# Altium PCB POWER_TESTER_V2.PcbDoc (part 1 of 2)
Units mm, origin at the board's own origin, x right, y up, seen from the top; angles counter-clockwise.
Board outline 100 x 151 mm, 2 copper layers (Top Layer, Bottom Layer); 154 components, 159 nets, 653 pads, 187 vias.
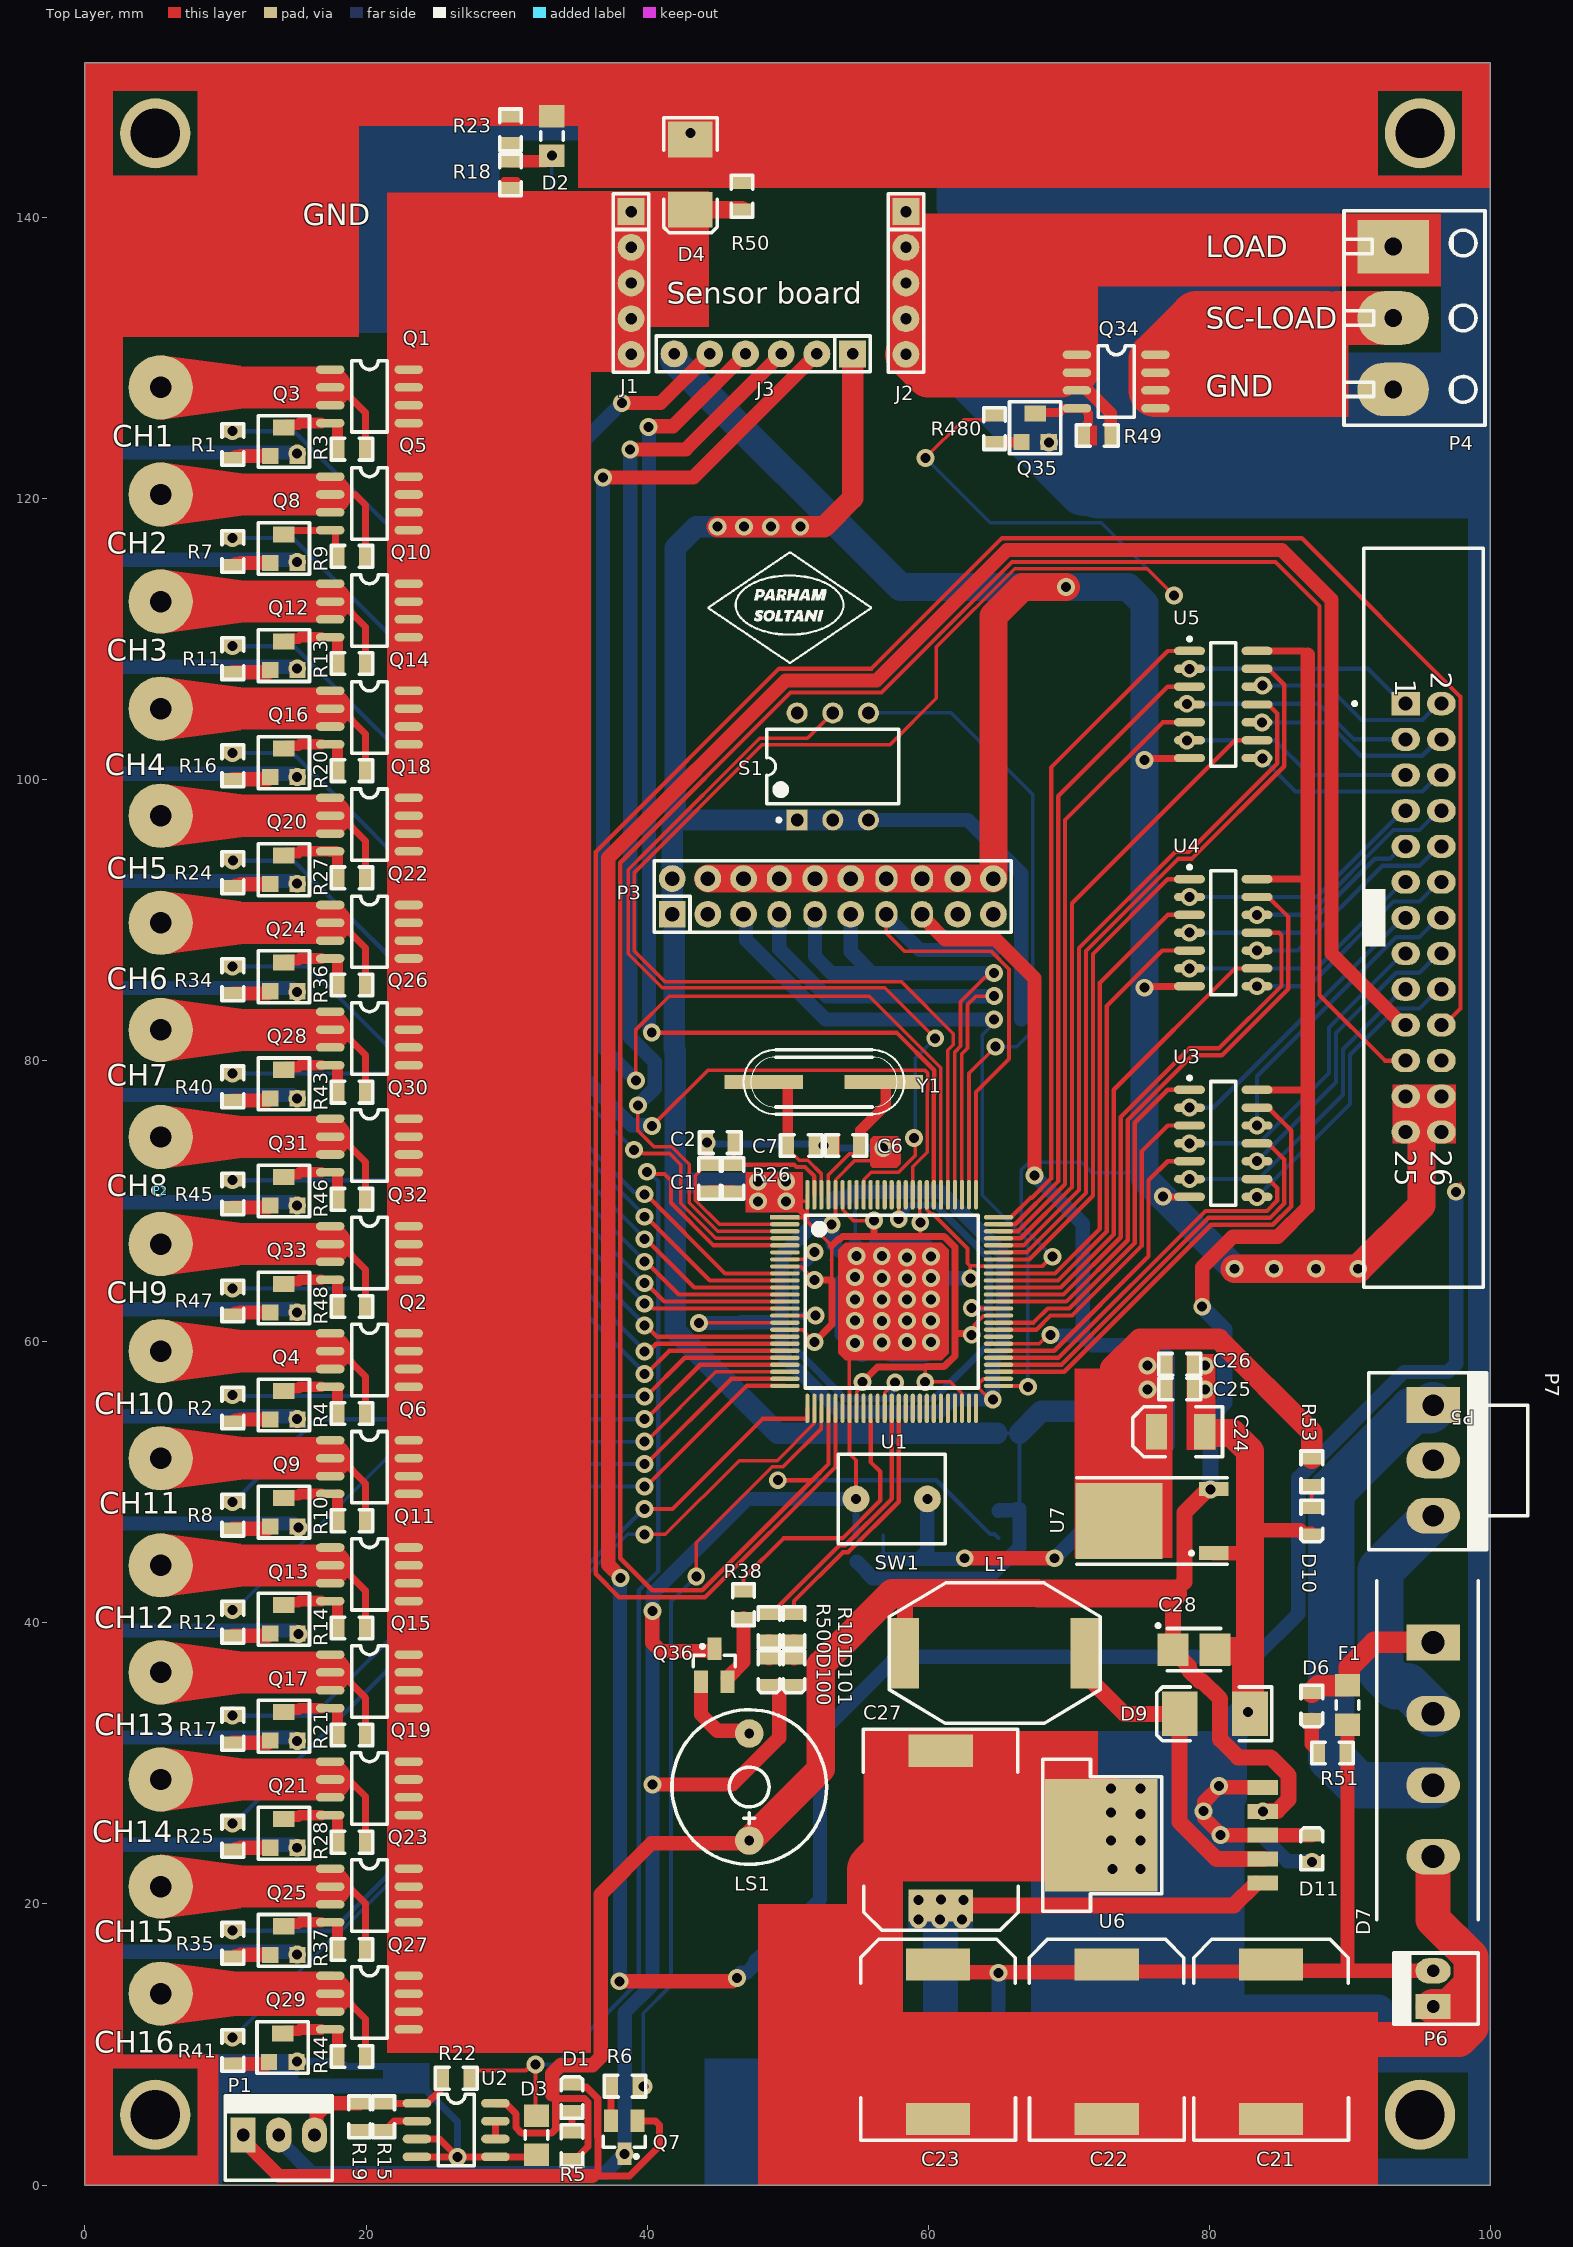
[diagram p0: Top Layer view]
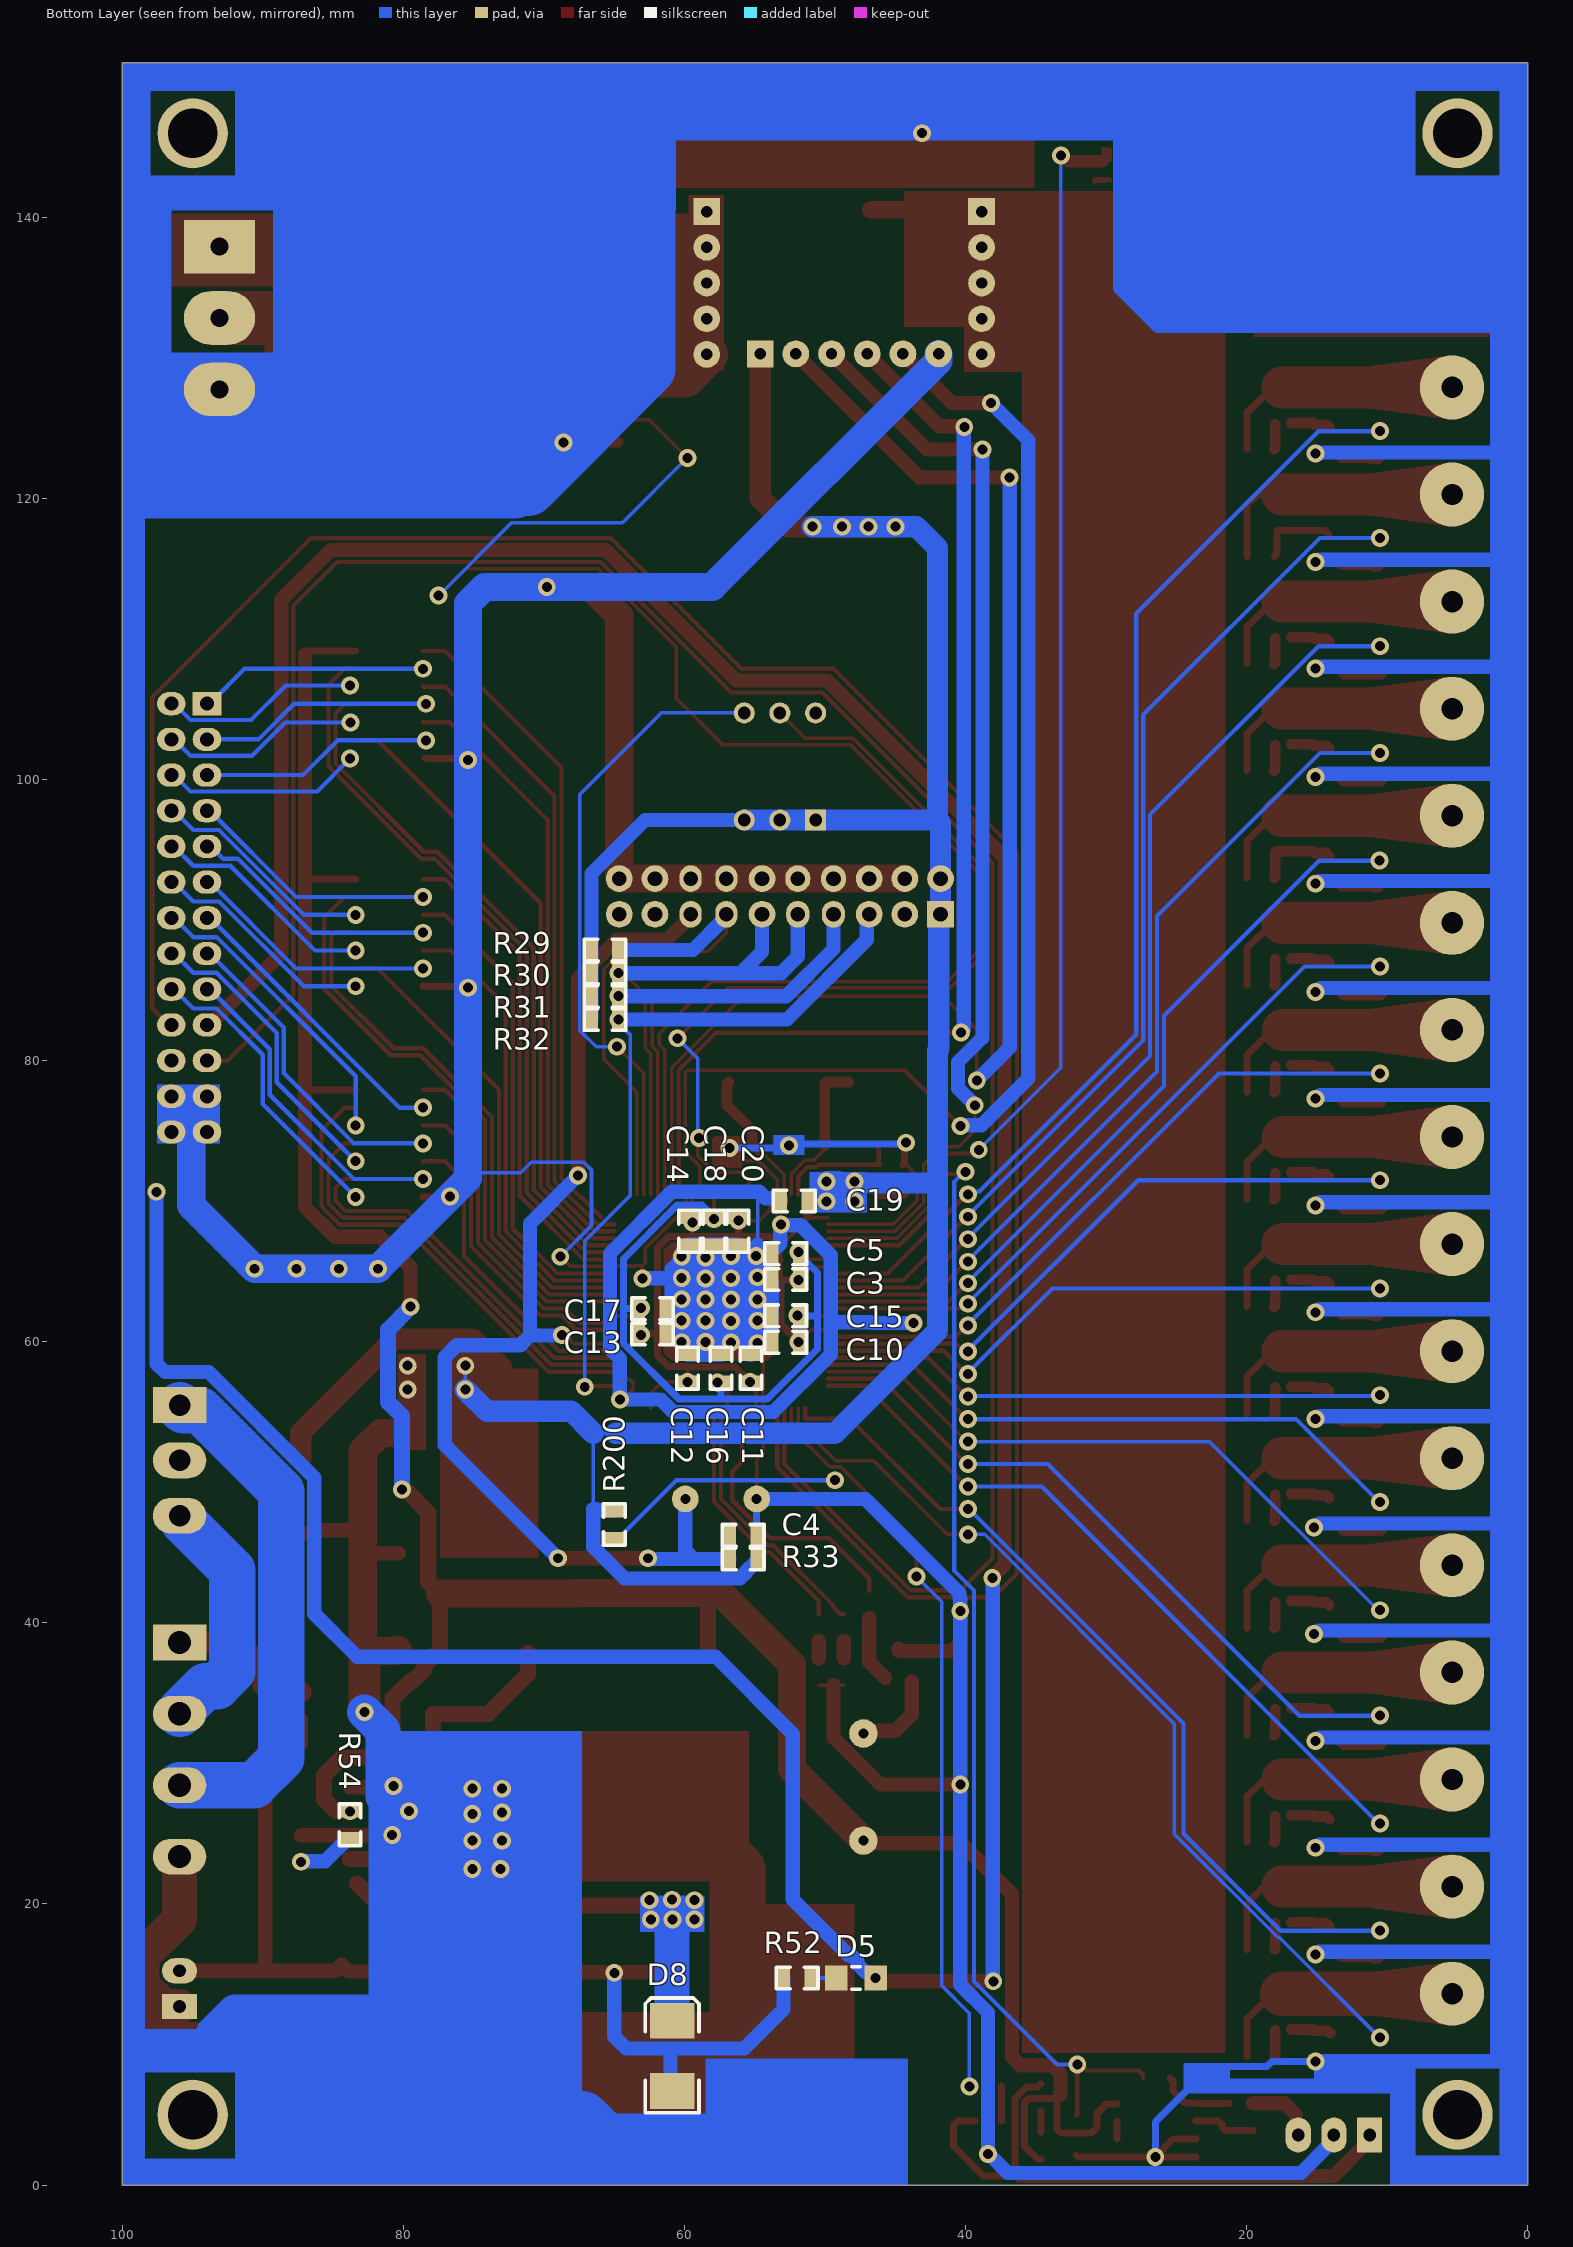
[diagram p1: Bottom Layer view, seen from below]

## Layer stack, top to bottom
Top Solder: solder mask 0.0102, Solder Resist, Dk 3.5
Top Layer: signal copper 0.0356
Dielectric1: dielectric 0.32, FR-4, Dk 4.8
Bottom Layer: signal copper 0.0356
Bottom Solder: solder mask 0.0102, Solder Resist, Dk 3.5

## Board outline
0,0 0,151 100,151 100,0

## Design rules (kind name [scope] priority, off if disabled: settings)
Clearance Clearance_1 [(InNet('GND') OR InNet('SGND')) vs (InNet('GND') OR InNet('SGND'))] p1: gap=0 ignorepadtopadclearanceinfootprint=FALSE
Clearance [All] p2: gap=0.191 ignorepadtopadclearanceinfootprint=FALSE except(0: Arc-Hole Track-Hole SMDPad-Hole THPad-Hole Via-Hole Fill-Hole Poly-Hole Region-Hole Text-Hole)
ComponentClearance [All] p1 off: gap=0.254 collisioncheckmode=3 verticalgap=0.254 showdistances=FALSE
Height [All] p1 off: minheight=0 maxheight=25.4 prefheight=12.7
HoleSize [All] p1 off: absolutevalues=TRUE maxlimit=2.54 minlimit=0.025 maxpercent=80.000 minpercent=20.000
HoleToHoleClearance [All] p1 off: gap=0.254 allowstackedmicrovias=TRUE
LayerPairs [All] p1 off: enforce=TRUE
MinimumSolderMaskSliver [All] p1 off: minsoldermaskwidth=0.254
NetAntennae [All] p1 off: netantennaetolerance=0
PolygonConnect [All] p1: connectstyle=Direct reliefconductorwidth=0.254 reliefentries=4 polygonreliefangle="90 Angle" airgapwidth=0.254
RoutingVias [All] p1: holewidth=0.711 width=1.27 viastyle="Through Hole" minholewidth=0.279 minwidth=0.762 maxholewidth=1.27 maxwidth=2.54
ShortCircuit [(InNet('GND') OR InNet('SGND')) vs (InNet('GND') OR InNet('SGND'))] p1: allowed=TRUE
SilkToSilkClearance [All] p1 off: silktosilkclearance=0.254
SilkToSolderMaskClearance [IsPad] p1 off: minsilkscreentomaskgap=0.254 clearancetoexposedcopper=TRUE
SolderMaskExpansion [All] p1: expansion=0.102 istentingtop=FALSE
Width [All] p1: maxlimit=5.08 minlimit=0.254 preferedwidth=1.016
20 further rules are at their usual default settings.

## Classes and differential pairs
component class PAGE1: C3 C4 C5 C10 C11 C12 C13 C14 C15 C16 C17 C18 C19 C20 C28 D5 D8 R29 R30 R31 R32 R33 R52 R54 R200

## Components (designator, comment, footprint, x,y, rotation, side; value= is the part's Value field where it differs from the comment)
C1 "10nF" 0603BIG 44.45,71.628 r90 top
C2 "1nF" 0603BIG 45.212,74.168 r180 top
C3 "10uF" 0603BIG 52.807,64.44 r180 bottom
C4 "10uF" 0603BIG 55.829,46.228 r0 bottom
C5 "10uF" 0603BIG 52.806,66.269 r180 bottom
C6 "10pF" 0603BIG 54.153,73.965 r180 top
C7 "10pF" 0603BIG 50.978,73.965 r0 top
C10 "100nF" 0603BIG 52.806,59.969 r0 bottom
C11 "100nF" 0603BIG 55.27,58.115 r90 bottom
C12 "100nF" 0603BIG 59.792,58.115 r90 bottom
C13 "100nF" 0603BIG 62.281,60.554 r180 bottom
C14 "100nF" 0603BIG 59.639,67.869 r270 bottom
C15 "100nF" 0603BIG 52.806,61.849 r0 bottom
C16 "100nF" 0603BIG 57.404,58.115 r90 bottom
C17 "100nF" 0603BIG 62.281,62.357 r180 bottom
C18 "100nF" 0603BIG 57.912,67.869 r270 bottom
C19 "100nF" 0603BIG 52.197,70.028 r0 bottom
C20 "100nF" 0603BIG 56.21,67.869 r270 bottom
C21 "470uf" CAP-SMD-HV2 84.4,15.7 r270 top
C22 "470uf" CAP-SMD-HV2 72.7,15.7 r270 top
C23 "470uf" CAP-SMD-HV2 60.7,15.7 r270 top
C24 "220uf" 1210-C 76.247,53.594 r270 top
C25 "100n" 0603big 77.898,56.642 r180 top
C26 "10n" 0603big 77.898,58.395 r180 top
C27 "220U-50V" CAP-SMD-HV2 60.9,19.9 r90 top
C28 "100u 10V" CAP_TANTAL_B 78.914,38.1 r0 top
D1 "LED" 0805-d1 34.652,5.258 r90 top
D2 "D Zener" 8-1206 33.223,145.81 r270 top
D3 "D Zener" 8-1206 32.131,3.546 r90 top
D4 "DIODE" ss14 43.078,145.553 r270 top
D5 "D Zener" 8-1206 47.796,14.732 r0 bottom
D6 "LED" 0805-2D 87.296,35.052 r270 top
D7 "BRIDGE" BRG5A 95.932,23.368 r0 top
D8 "50SQ080" SS14 60.88,6.684 r90 bottom
D9 "SS16" SS14 82.898,33.528 r180 top
D10 "LED" 0805-D1 87.296,48.209 r270 top
D11 "LED" 0805-d1 87.296,22.962 r90 top
D100 "LED" 0805-d1 48.666,37.49 r270 top
D101 "LED" 0805-d1 50.444,37.49 r270 top
F1 "FUSE" 8-1206 89.836,34.16 r270 top
J1 "CON5" SIP5 38.862,135.342 r90 top
J2 "CON5" SIP5 58.42,135.342 r90 top
J3 "CON6" SIP6 48.27,130.3 r0 top
L1 "22UH 5A" "self smd" 71.14,37.846 r0 top
LS1 "Buzzer" Buzzer 47.269,28.321 r180 top
P1 "Header 3" mokhaberati3PIN 9.982,0.35 r0 top
P2 "Header 16" wire_connector 5.385,63.144 r270 top
P3 "Header 10X2" IDC20 41.783,90.424 r0 top
P4 "Header 3" "PHONIX 3" 93.091,132.853 r270 top
P5 "Header 13X2" 918526x904 95.25,90.17 r270 top
P6 "Header 2" mokhaberati 93.138,16.51 r90 top
P7 "Header 3" SIP3-155-la 95.932,51.562 r270 top
Q1 "IRF9310" so-8 20.244,127.279 r0 top
Q2 "IRF9310" so-8 20.244,58.699 r0 top
Q3 "2N7002" SOT-23 14.148,124.054 r0 top
Q4 "2N7002" SOT-23 14.148,55.489 r0 top
Q5 "IRF9310" so-8 20.244,119.659 r0 top
Q6 "IRF9310" so-8 20.244,51.079 r0 top
Q7 "2N2222" SOT23_M 38.379,3.385 r270 top
Q8 "2N7002" SOT-23 14.148,116.435 r0 top
Q9 "2N7002" SOT-23 14.148,47.871 r0 top
Q10 "IRF9310" so-8 20.244,112.039 r0 top
Q11 "IRF9310" so-8 20.244,43.459 r0 top
Q12 "2N7002" SOT-23 14.148,108.817 r0 top
Q13 "2N7002" SOT-23 14.148,40.252 r0 top
Q14 "IRF9310" so-8 20.244,104.419 r0 top
Q15 "IRF9310" so-8 20.244,35.839 r0 top
Q16 "2N7002" SOT-23 14.148,101.199 r0 top
Q17 "2N7002" SOT-23 14.148,32.634 r0 top
Q18 "IRF9310" so-8 20.244,96.799 r0 top
Q19 "IRF9310" so-8 20.244,28.219 r0 top
Q20 "2N7002" SOT-23 14.148,93.58 r0 top
Q21 "2N7002" SOT-23 14.148,25.016 r0 top
Q22 "IRF9310" so-8 20.244,89.179 r0 top
Q23 "IRF9310" so-8 20.244,20.599 r0 top
Q24 "2N7002" SOT-23 14.148,85.962 r0 top
Q25 "2N7002" SOT-23 14.148,17.397 r0 top
Q26 "IRF9310" so-8 20.244,81.585 r0 top
Q27 "IRF9310" so-8 20.244,12.979 r0 top
Q28 "2N7002" SOT-23 14.148,78.344 r0 top
Q29 "2N7002" SOT-23 14.072,9.779 r0 top
Q30 "IRF9310" so-8 20.244,73.965 r0 top
Q31 "2N7002" SOT-23 14.148,70.725 r0 top
Q32 "IRF9310" so-8 20.244,66.319 r0 top
Q33 "2N7002" SOT-23 14.148,63.107 r0 top
Q34 "IRF9310" so-8 73.381,128.332 r0 top
Q35 "2N7002" SOT-23 67.615,125.03 r0 top
Q36 "2N2222" SOT23_M 44.78,36.982 r90 top
R1 "330" 0603BIG 10.516,123.85 r90 top
R2 "330" 0603BIG 10.516,55.285 r90 top
R3 "10k" 0603BIG 18.999,123.52 r0 top
R4 "10k" 0603BIG 18.999,54.894 r0 top
R5 "1K" 0603BIG 34.646,2.806 r90 top
R6 "500" 0603BIG 38.43,7.036 r0 top
R7 "330" 0603BIG 10.516,116.232 r90 top
R8 "330" 0603BIG 10.516,47.667 r90 top
R9 "10k" 0603BIG 18.999,115.895 r0 top
R10 "10k" 0603BIG 18.999,47.269 r0 top
R11 "330" 0603BIG 10.516,108.614 r90 top
R12 "330" 0603BIG 10.516,40.049 r90 top
R13 "10k" 0603BIG 18.999,108.27 r0 top
R14 "10k" 0603BIG 18.999,39.644 r0 top
R15 "820" 0603BIG 21.26,4.852 r270 top
R16 "330" 0603BIG 10.516,100.995 r90 top
R17 "330" 0603BIG 10.516,32.431 r90 top
R18 "1K" 0603BIG 30.277,143.038 r90 top
R19 "1K" 0603BIG 19.533,4.852 r90 top
R20 "10k" 0603BIG 18.999,100.645 r0 top
R21 "10k" 0603BIG 18.999,32.019 r0 top
R22 "1k" 0603big 26.416,7.595 r180 top
R23 "1K" 0603BIG 30.277,146.239 r90 top
R24 "330" 0603BIG 10.516,93.377 r90 top
R25 "330" 0603BIG 10.516,24.812 r90 top
R26 "1.5K" 0603BIG 46.101,71.628 r270 top
R27 "10k" 0603BIG 18.999,93.02 r0 top
R28 "10k" 0603BIG 18.999,24.394 r0 top
R29 "100K" 0603BIG 65.659,87.884 r180 bottom
R30 "100K" 0603BIG 65.659,86.233 r180 bottom
R31 "100K" 0603BIG 65.659,84.582 r180 bottom
R32 "100K" 0603BIG 65.659,82.931 r180 bottom
R33 "1K" 0603BIG 55.829,44.552 r0 bottom
R34 "330" 0603BIG 10.516,85.759 r90 top
R35 "330" 0603BIG 10.516,17.194 r90 top
R36 "10k" 0603BIG 18.999,85.395 r0 top
R37 "10k" 0603BIG 18.999,16.769 r0 top
R38 "1K" 0603BIG 46.863,41.3 r90 top
R40 "330" 0603BIG 10.516,78.14 r90 top
R41 "330" 0603BIG 10.516,9.576 r90 top
R43 "10k" 0603BIG 18.999,77.77 r0 top
R44 "10k" 0603BIG 18.999,9.144 r0 top
R45 "330" 0603BIG 10.516,70.522 r90 top
R46 "10k" 0603BIG 18.999,70.145 r0 top
R47 "330" 0603BIG 10.516,62.904 r90 top
R48 "10k" 0603BIG 18.999,62.52 r0 top
R49 "10k" 0603BIG 72.034,124.497 r0 top
R50 "10k" 0603BIG 46.746,141.518 r270 top
R51 "1k" 0603BIG 88.769,30.734 r180 top
R52 "330" 0603BIG 51.99,14.732 r180 bottom
R53 "R" 0603big 87.296,50.749 r90 top
R54 "R" 0603big 83.81,25.627 r90 bottom
R101 "1K" 0603BIG 50.45,39.675 r270 top
R200 "1K" 0603BIG 65,47 r90 bottom
R480 "330" 0603BIG 64.719,124.979 r90 top
R500 "1K" 0603BIG 48.672,39.675 r270 top
S1 "SW DIP-3" DIP-6 53.213,100.94 r90 top
SW1 "P.B" SW_200 54.864,48.819 r90 top
U1 "AT91SAM7X256-AU" LQFP100 57.404,62.865 r0 top
U2 "LM258" so-8 26.416,3.912 r0 top
U3 "SN7404N" D014_N 81,74.122 r0 top
U4 "SN7404N" D014_N 81,89.112 r0 top
U5 "SN7404N" D014_N 81,105.352 r0 top
U6 "LM2576-5v" LM2576-SMD 83.81,21.492 r90 top
U7 "LD1086DT33" 7805_SMD 76.955,47.244 r90 top
Y1 "18.432 MHZ" NIRAXTAL-smd 52.578,78.486 r180 top

## Footprints (in the part's own frame and the unit in brackets; to place one, negate y for a bottom-side part, rotate by r counter-clockwise, add the part's x,y. Pads: shape width x height; smd on the part's side, far side on the other; paste and mask are expansions set on the pad)
8-1206 [mm] "Chip Resistor; Body 3.1 x 1.6 mm (LxW typ)"
  rect 1.6x1.8 smd: 1(-1.4,0) 2(1.4,0)
  silkscreen extent -0.3,-0.8 0.3,0.8
0603BIG [mm]
  rect 0.9x1.4 smd: 1(0.965,0) 2(-0.965,0)
  silkscreen extent -1.48,-0.77 1.49,0.77
0603big [mm]
  rect 0.9x1.4 smd: 1(0.965,0) 2(-0.965,0)
  silkscreen extent -1.48,-0.77 1.49,0.77
0805-2D [mm]
  rect 0.9x1.4 smd: A(0,0) K(1.93,0)
  silkscreen extent -0.52,-0.77 2.45,0.77
0805-d1 [mm]
  rect 0.9x1.4 smd: A(0,0) K(1.93,0)
  silkscreen extent -0.52,-0.77 2.45,0.77
0805-D1 [mm]
  rect 0.9x1.4 smd: A(0,0) K(1.93,0)
  silkscreen extent -0.52,-0.77 2.45,0.77
1210-C [mil]
  rect 100x60 smd: 1(0,0) 2(0,135)
  silkscreen extent -70,-66 70,185
7805_SMD [mm]
  rect 1x2.1 smd: 1(2.285,-3.375) 2(-2.285,-3.375)
  rect 5.4x6.2 smd: 3(0,3.375)
  silkscreen extent -3.08,-4.33 3.08,6.37
918526x904 [mm] "Connector; IDC, Thru-Hole; 26 Position; Vertical; Pitch 2.54 mm; Body 52.60 x 8.5 x 25.75 mm (LxWxH), Locking levers"
  rect 1.65x2.032 hole 1: 1(-15.24,-1.27)
  oval 1.65x2.032 hole 1: 2(-15.24,1.27) 3(-12.7,-1.27) 4(-12.7,1.27) 5(-10.16,-1.27) 6(-10.16,1.27) 7(-7.62,-1.27) 8(-7.62,1.27) 9(-5.08,-1.27) 10(-5.08,1.27) 11(-2.54,-1.27) 12(-2.54,1.27) 13(0,-1.27) 14(0,1.27) 15(2.54,-1.27) 16(2.54,1.27) 17(5.08,-1.27) 18(5.08,1.27) 19(7.62,-1.27) 20(7.62,1.27) 21(10.16,-1.27) 22(10.16,1.27) 23(12.7,-1.27) 24(12.7,1.27) 25(15.24,-1.27) 26(15.24,1.27)
  silkscreen extent -26.3,-5.02 26.3,4.25
BRG5A [mil]
  oval 150x100 hole 65: AC1(0,200) AC2(0,400) DC-(0,0)
  rect 150x100 hole 65: DC+(0,600)
  silkscreen extent -157,-177 126,773
Buzzer [mil]
  round 80 hole 27.56: 1A(0,150) 2A(0,-150)
  silkscreen extent -217,-216 216,216
CAP-SMD-HV2 [mil]
  rect 90x180 smd: 1(0,0) 2(433.07,0)
  silkscreen extent -70,-217 493,217
CAP_TANTAL_B [mm] "Molded Capacitor, 2-Leads, Body 3.50x2.80mm, IPC Medium Density"
  rect 2.2x2.3 smd: 1(-1.5,0) 2(1.5,0)
  silkscreen extent -2.67,-1.5 1.9,1.82, body extent -1.85,-1.5 1.85,1.5, height 1.9
D014_N [mm] "SOIC, 14-Leads, Body 8.7x3.9mm, Pitch 1.27mm, IPC Medium Density"
  oval 2.2x0.6 smd: 1(-2.4,3.81) 2(-2.4,2.54) 3(-2.4,1.27) 4(-2.4,0) 5(-2.4,-1.27) 6(-2.4,-2.54) 7(-2.4,-3.81) 8(2.4,-3.81) 9(2.4,-2.54) 10(2.4,-1.27) 11(2.4,0) 12(2.4,1.27) 13(2.4,2.54) 14(2.4,3.81)
  silkscreen extent -2.52,-4.4 0.9,4.78, body extent -1.95,-4.33 1.95,4.33, height 1.75
DIP-6 [mm] "DIP; 6 Leads; Row Spacing 7.62 mm; Pitch 2.54 mm"
  rect 1.5x1.5 hole 0.9: 1(-3.81,2.54)
  round 1.5 hole 0.9: 2(-3.81,0) 3(-3.81,-2.54) 4(3.81,-2.54) 5(3.81,0) 6(3.81,2.54)
  silkscreen extent -3.93,-4.7 2.65,4.7, body extent -3.55,-4.7 3.55,4.7, height 5.46
IDC20 [mil]
  rect 75x75 hole 41: 1(0,0)
  round 75 hole 41: 2(0,100) 3(100,0) 4(100,100) 5(200,0) 6(200,100) 11(500,0) 12(500,100) 17(800,0) 18(800,100) 19(900,0) 20(900,100)
  oval 65x75 hole 41: 7(300,0) 9(400,0)
  oval 70x75 hole 41: 8(300,100) 10(400,100)
  oval 62x75 hole 41: 13(600,0) 14(600,100) 15(700,0) 16(700,100)
  silkscreen extent -50,-50 950,150
LM2576-SMD [mm]
  rect 1.07x2.16 smd: FB(5.1,0) GND(3.4,0) O\N\/OFF(6.8,0) OUT(1.7,0) VIN(0,0)
  rect 8x8 smd: GND(3.4,11.5)
  silkscreen extent -2,7.18 8.8,15.67
LQFP100 [mm]
  rect 2.1x0.3 smd: 1(-7.6,6)
  oval 2.1x0.3 smd: 2(-7.6,5.5) 3(-7.6,5) 4(-7.6,4.5) 5(-7.6,4) 6(-7.6,3.5) 7(-7.6,3) 8(-7.6,2.5) 9(-7.6,2) 10(-7.6,1.5) 11(-7.6,1) 12(-7.6,0.5) 13(-7.6,0) 14(-7.6,-0.5) 15(-7.6,-1) 16(-7.6,-1.5) 17(-7.6,-2) 18(-7.6,-2.5) 19(-7.6,-3) 20(-7.6,-3.5) 21(-7.6,-4) 22(-7.6,-4.5) 23(-7.6,-5) 24(-7.6,-5.5) 25(-7.6,-6) 51(7.6,-6) 52(7.6,-5.5) 53(7.6,-5) 54(7.6,-4.5) 55(7.6,-4) 56(7.6,-3.5) 57(7.6,-3) 58(7.6,-2.5) 59(7.6,-2) 60(7.6,-1.5) 61(7.6,-1) 62(7.6,-0.5) 63(7.6,0) 64(7.6,0.5) 65(7.6,1) 66(7.6,1.5) 67(7.6,2) 68(7.6,2.5) 69(7.6,3) 70(7.6,3.5) 71(7.6,4) 72(7.6,4.5) 73(7.6,5) 74(7.6,5.5) 75(7.6,6)
  oval 0.3x2.1 smd: 26(-6,-7.6) 27(-5.5,-7.6) 28(-5,-7.6) 29(-4.5,-7.6) 30(-4,-7.6) 31(-3.5,-7.6) 32(-3,-7.6) 33(-2.5,-7.6) 34(-2,-7.6) 35(-1.5,-7.6) 36(-1,-7.6) 37(-0.5,-7.6) 38(0,-7.6) 39(0.5,-7.6) 40(1,-7.6) 41(1.5,-7.6) 42(2,-7.6) 43(2.5,-7.6) 44(3,-7.6) 45(3.5,-7.6) 46(4,-7.6) 47(4.5,-7.6) 48(5,-7.6) 49(5.5,-7.6) 50(6,-7.6) 76(6,7.6) 77(5.5,7.6) 78(5,7.6) 79(4.5,7.6) 80(4,7.6) 81(3.5,7.6) 82(3,7.6) 83(2.5,7.6) 84(2,7.6) 85(1.5,7.6) 86(1,7.6) 87(0.5,7.6) 88(0,7.6) 89(-0.5,7.6) 90(-1,7.6) 91(-1.5,7.6) 92(-2,7.6) 93(-2.5,7.6) 94(-3,7.6) 95(-3.5,7.6) 96(-4,7.6) 97(-4.5,7.6) 98(-5,7.6) 99(-5.5,7.6) 100(-6,7.6)
  silkscreen extent -6.15,-6.15 6.15,6.15
mokhaberati [mm] "Connector; Header; 2 Position"
  rect 1.8x2.5 hole 0.9: 1(-3.81,-2.794)
  oval 1.8x2.5 hole 0.9: 2(-1.27,-2.794)
  silkscreen extent -5.09,-6 0,0
mokhaberati3PIN [mm] "Connector; Header; 2 Position"
  rect 1.8x2.5 hole 0.9: 1(1.27,3.206)
  oval 1.8x2.5 hole 0.9: 2(3.81,3.206) 3(6.35,3.206)
  silkscreen extent -0.01,0 7.62,6
NIRAXTAL-smd [mil] "Connector; Header; 3 Position"
  rect 220.47x40 smd: 1(-168,0) 2(168,0)
  silkscreen extent -225,-90 225,90
"PHONIX 3" [mm]
  rect 3.81x5.08 hole 1.27: 1(-5.08,0)
  oval 3.81x5.08 hole 1.27: 2(0,0) 3(5.08,0)
  silkscreen extent -7.62,-3.5 7.62,6.53
"self smd" [mm]
  rect 2x5 smd: 1(0,0) 2(-12.8,0)
  silkscreen extent -13.9,-5 1.1,5
SIP3-155-la [mil]
  rect 100x150 hole 60: 1(-155,0)
  oval 100x150 hole 60: 2(0,0) 3(155,0)
  silkscreen extent -245,-180 250,265
SIP5 [mil]
  rect 75x75 hole 32: 1(200,0)
  round 75 hole 32: 2(100,0) 3(0,0) 4(-100,0) 5(-200,0)
  silkscreen extent -250,-50 250,50
SIP6 [mil]
  rect 75x75 hole 32: 1(250,0)
  round 75 hole 32: 2(150,0) 3(50,0) 4(-50,0) 5(-150,0) 6(-250,0)
  silkscreen extent -300,-50 300,50
so-8 [mil]
  oval 80x24 smd: 1(-110,75) 2(-110,25) 3(-110,-25) 4(-110,-75) 5(110,-75) 6(110,-25) 7(110,25) 8(110,75)
  silkscreen extent -50,-100 50,100
SOT23_M [mm] "SOT23, 3-Leads, Body 2.9x1.3mm, Pitch 0.95mm, Lead Span 2.3mm - Reverse Pinning, IPC Low Density"
  rect 1.6x1 smd: 1(1.175,0) 2(-1.175,-0.95) 3(-1.175,0.95)
  silkscreen extent -0.1,-1.5 1.47,1.5, body extent -0.7,-1.5 0.7,1.5, height 1.1
SOT-23 [mil]
  rect 45x45 smd: 1(-38,-40) 3(38,-40)
  rect 60x45 smd: 2(0,40)
  silkscreen extent -72,-72 72,73
ss14 [mm]
  rect 2.54x3.175 smd: A(0,0) K(5,0)
  silkscreen extent -1.55,-1.91 6.62,1.91
SS14 [mm]
  rect 2.54x3.175 smd: A(0,0) K(5,0)
  silkscreen extent -1.55,-1.91 6.62,1.91
SW_200 [mil]
  round 75 hole 28: 1(0,0) 2(0,-200)
  silkscreen extent -125,-250 125,50
wire_connector [mil]
  round 180 hole 60: 1(-2550,0) 2(-2250,0) 3(-1950,0) 4(-1650,0) 5(-1350,0) 6(-1050,0) 7(-750,0) 8(-450,0) 9(-150,0) 10(150,0) 11(450,0) 12(750,0) 13(1050,0) 14(1350,0) 15(1650,0) 16(1950,0)

## Part data
C1 C2 C6 C7 C10 C11 C12 C13 C14 C15 C16 C17 C18 C19 C20: library part Cap, "Capacitor"
C3 C5: library part "Cap Pol1", "10v"
C4: library part "Cap Pol1", "Polarized Capacitor (Radial)"
C21 C22 C23 C24: library part CAP_Dup1
C25 C26: library part C
C27 C28: library part CAP
D2 D3 D5: "Zener Diode"
D4: library part DIODE_0
D8 D9: library part DIODE
L1: library part L
LS1: "Magnetic Transducer Buzzer"
P1 P4 P7: "Header, 3-Pin"
P2: "Header, 16-Pin"
P3: "Header, 10-Pin, Dual row"
P5: "Header, 13-Pin, Dual row"
P6: "Header, 2-Pin"
Q1 Q2 Q5 Q6 Q10 Q11 Q14 Q15 Q18 Q19 Q22 Q23 Q26 Q27 Q30 Q32 Q34: library part IRF9310_0
Q3 Q4 Q8 Q9 Q12 Q13 Q16 Q17 Q20 Q21 Q24 Q25 Q28 Q29 Q31 Q33 Q35: library part "MOSFET N"
Q7 Q36: "General Purpose Transistor NPN Silicon"
R1 R2 R3 R4 R7 R8 R9 R10 R11 R12 R13 R14 R16 R17 R20 R21 R24 R25 R27 R28 R34 R35 R36 R37 R40 R41 R43 R44 R45 R46 R47 R48 R49 R50 R480: library part R_Dup4
R5 R6 R18 R22 R23 R26 R29 R30 R31 R32 R33 R38 R52 R101 R200 R500: library part Res1, "Resistor"
R15 R19 R51: library part R
S1: "DIP Switch, 3 Position, SPST"
SW1: library part Push-Button
U1: "AT91 ARM Thumb-based 32-bit Microcontroller, 256KB Flash, 64KB SRAM, E-MAC, CAN, 100-Pin LQFP, Industrial Grade (-40°C to 85°C), Pb-Free"
U2: library part OP279GS, "Rail-to-Rail High-Output-Current Operational Amplifier"
U3 U4 U5: "Hex Inverter"
U6: library part LM2576/TO_0
U7: library part LT1086-12/TO
Y1: library part XTAL, "Crystal Oscillator"

## Free pads (board coordinates)
  round 5 hole 3.5: 5(5,5) 5(5,146) 5(95,5) 5(95,146)

## Via types
v1: diameter 1.27, hole 0.711, Top Layer to Bottom Layer, 187 vias

## Nets (pads, with @x,y where several pads share a name; then routed paths per layer and width w, separated by ;. In a path a pad name is that pad's centre, name@x,y a point inside that pad or via, vN(x,y) a via of type N, cw(c..) or ccw(c..) an arc to the next point about the centre after c; other vN are vias at no path point)
#CNT-CH1: R1.1 U1.9 | length 81.7
  Top Layer w0.305: v1(39.822,70.5) 39.917,70.5 45.552,64.865 U1.9@49.804,64.865
  Bottom Layer w0.305: v1(10.5,124.8) 14.883,124.8 27.861,111.822 27.861,81.861 39.037,70.685 39.637,70.685 v1(39.822,70.5)
#CNT-CH2: R7.1 U1.10 | length 74.8
  Top Layer w0.305: v1(39.822,68.9) 39.917,68.9 44.452,64.365 U1.10@49.804,64.365
  Bottom Layer w0.305: v1(10.5,117.2) 14.783,117.2 27.366,104.617 27.366,81.451 39.822,68.995 v1(39.822,68.9)
#CNT-CH3: R11.1 U1.11 | length 68.3
  Top Layer w0.305: v1(39.822,67.3) 39.917,67.3 43.352,63.865 U1.11@49.804,63.865
  Bottom Layer w0.305: v1(10.5,109.5) 14.883,109.5 26.871,97.512 26.871,80.346 39.822,67.395 v1(39.822,67.3)
#CNT-CH4: R16.1 U1.12 | length 61.8
  Top Layer w0.305: v1(39.822,65.7) 39.917,65.7 42.252,63.365 U1.12@49.804,63.365
  Bottom Layer w0.305: v1(10.5,101.9) 14.783,101.9 26.375,90.308 26.375,79.242 39.822,65.795 v1(39.822,65.7)
#CNT-CH5: R24.1 U1.13 | length 55.2
  Top Layer w0.305: v1(39.822,64.171) 39.916,64.171 41.223,62.865 U1.13@49.804,62.865
  Bottom Layer w0.305: v1(10.536,94.238) 14.845,94.238 25.88,83.203 25.88,78.208 39.822,64.266 v1(39.822,64.171)
#CNT-CH6: R34.1 U1.14 | length 49.4
  Top Layer w0.305: v1(39.822,62.711) 40.083,62.711 40.429,62.365 U1.14@49.804,62.365
  Bottom Layer w0.305: v1(10.5,86.7) 15.877,86.7 39.822,62.755 v1(39.822,62.711)
#CNT-CH7: R40.1 U1.18 | length 47.1
  Top Layer w0.305: v1(39.822,61.161) 39.917,61.161 40.713,60.365 U1.18@49.804,60.365
  Bottom Layer w0.305: v1(10.5,79.1) 21.978,79.1 39.822,61.256 v1(39.822,61.161)
#CNT-CH8: R45.1 U1.19 | length 44.6
  Top Layer w0.305: v1(39.822,59.3) 40.083,59.3 40.648,59.865 U1.19@49.804,59.865
  Bottom Layer w0.305: v1(10.5,71.5) 27.717,71.5 39.822,59.395 v1(39.822,59.3)
#CNT-CH9: R47.1 U1.20 | length 42.6
  Top Layer w0.305: v1(39.822,57.7) 39.917,57.7 41.582,59.365 U1.20@49.804,59.365
  Bottom Layer w0.305: v1(10.5,63.8) 33.817,63.8 39.822,57.795 v1(39.822,57.7)
#CNT-CH10: R2.1 U1.21 | length 40.5
  Top Layer w0.305: v1(39.822,56.1) 39.917,56.1 42.682,58.865 U1.21@49.804,58.865
  Bottom Layer w0.305: v1(10.5,56.2) 10.55,56.15 39.772,56.15 v1(39.822,56.1)
#CNT-CH11: R8.1 U1.22 | length 43.3
  Top Layer w0.305: v1(39.822,54.5) 39.917,54.5 43.782,58.365 U1.22@49.804,58.365
  Bottom Layer w0.305: v1(10.5,48.6) 10.583,48.6 16.483,54.5 v1(39.822,54.5)
#CNT-CH12: R12.1 U1.23 | length 46.3
  Top Layer w0.254: v1(39.822,52.9) 39.917,52.9 44.882,57.865 U1.23@49.804,57.865
  Bottom Layer w0.254: v1(10.5,40.9) 10.647,40.9 22.647,52.9 v1(39.822,52.9)
#CNT-CH13: R17.1 U1.24 | length 49.2
  Top Layer w0.305: v1(39.822,51.3) 39.917,51.3 45.982,57.365 U1.24@49.804,57.365
  Bottom Layer w0.305: v1(10.5,33.4) 16.259,33.4 34.159,51.3 v1(39.822,51.3)
#CNT-CH14: R25.1 U1.25 | length 52.2
  Top Layer w0.305: v1(39.822,49.7) 39.917,49.7 47.082,56.865 U1.25@49.804,56.865
  Bottom Layer w0.305: v1(10.5,25.733) 10.616,25.733 34.583,49.7 v1(39.822,49.7)
#CNT-CH15: R35.1 U1.26 | length 61.3
  Top Layer w0.305: v1(39.822,48.1) 41.8,48.1 48.217,54.517 51.402,54.517 51.404,54.52 U1.26@51.404,55.265
  Bottom Layer w0.305: v1(10.5,18.1) 17.6,18.1 24.5,25 24.5,32.834 39.766,48.1 v1(39.822,48.1)
#CNT-CH16: R41.1 U1.27 | length 65.2
  Top Layer w0.254: v1(39.822,46.3) 41.3,46.3 46.549,51.549 49.249,51.549 51.895,54.195 51.895,55.256 U1.27@51.904,55.265
  Bottom Layer w0.254: v1(10.5,10.5) 10.547,10.5 17.677,17.63 17.795,17.63 25.165,25.001 25.165,32.834 38.631,46.3 v1(39.822,46.3)
#SHORT.CR: R480.1 U1.80 | length 120.6
  Top Layer w0.254: v1(59.8,122.9) 62.521,125.621 64.396,125.621 R480.1@64.719,125.944 ; U1.80@61.404,70.465 61.404,80.757 61.791,81.144 61.791,81.933 58.087,85.636 41.264,85.636 39.1,87.8 39.1,93.4 48.2,102.5 57.3,102.5 60.584,105.784 60.584,109.447 66.154,115.018 75.582,115.018 v1(77.5,113.1)
  Bottom Layer w0.254: v1(59.8,122.9) 64.418,118.282 72.318,118.282 v1(77.5,113.1)
+3.3V: C3.1 C10.2 C11.2 C12.2 C13.2 C14.2 C19.2 C20.2 C24.1 C25.1 C26.1 J3.1 P3.1 P3.2 R29.2 R30.2 R31.2 R32.2 R33.2 R53.1 R200.1 S1.1 S1.2 S1.3 U1.1 U1.8 U1.17 U1.33 U1.48 U1.61 U1.84 U1.95 U1.100 U7.3 | length 290.5
  Top Layer w0.254: U1.17@49.804,60.865 49.813,60.856 51.044,60.856 51.9,60 v1(51.9,59.995) ; U1.8@49.804,65.365 49.813,65.356 50.944,65.356 v1(51.9,64.4) ; U1.1@49.804,68.865 49.827,68.842 51.292,68.842 51.292,68.943 51.4,69.051 51.4,69.983 U1.100@51.383,70 ; v1(49.9,70) 50.263,70 U1.100@51.383,70 ; 51.119,68.842 53.132,66.829 53.154,65.8 ; U1.100@51.404,70.465 51.404,70.021 U1.100@51.383,70 ; 53.1,65.8 53.154,65.8 ; 53.154,64.4 53.154,65.8 ; U1.95@53.904,70.465 53.913,70.456 53.913,69.395 54.686,68.622 55.879,68.622 v1@56.017,68.485 ; U1.33@54.904,55.265 54.913,55.274 54.913,56.438 55.338,56.863 v1(55.338,57.138) ; U1.84@59.404,70.465 59.413,70.456 59.413,68.525 v1(59.438,68.5) 59.438,67.597 ; v1(59.792,57.15) 61.58,57.15 62.395,56.335 62.395,55.274 U1.48@62.404,55.265 ; v1@59.8,57.367 59.8,58.2 ; v1(63.1,60.5) 63.294,60.694 63.294,61.217 63.934,61.856 64.995,61.856 U1.61@65.004,61.865
  Top Layer w0.5: v1@50.263,70 51.204,69.06 51.204,68.93 51.292,68.842 ; v1(51.9,59.995) 53.154,61.249 53.154,64.4 v1(51.9,64.4) ; 53.132,66.829 53.572,67.269 53.692,67.269 53.92,67.496 61.142,67.496 61.908,66.73 61.908,60.6 ; v1(55.338,57.138) 56.4,58.2 59.8,58.2 59.833,58.234 61.142,58.234 61.908,59 61.908,60.6 ; 56.153,67.597 56.153,68.621 v1(56.154,68.622) ; v1(63.1,60.5) 63,60.6 61.908,60.6
  Top Layer w1.524: v1(45,118) v1(46.9,118) v1(48.8,118) 52.6,118 54.62,120.02 J3.1@54.62,130.3 ; 73,57.525 73,58.146 75.054,60.2 76.241,60.2 ; C24.1@76.247,53.594 76.247,54.102 75.43,54.102 73.8,55.732 73.8,57.045 75.193,58.438 75.53,58.438 75.53,59.489 76.241,60.2 ; R53.1@87.296,51.714 87.296,53.569 80.665,60.2 76.241,60.2
  Bottom Layer w0.254: v1@47.8,71.3 v1(47.9,71.4) ; C10.2@51.6,59.695 v1(51.9,59.995) C10.2@51.9,60.278 ; C3.1@51.842,64.44 51.86,64.44 v1(51.9,64.4) ; C11.2@55.27,57.15 55.326,57.15 v1(55.338,57.138) ; v1(56.154,68.622) 56.154,68.778 C20.2@56.21,68.834 ; v1(59.438,68.5) 59.438,68.632 C14.2@59.639,68.834 ; C12.2@59.542,57.15 v1(59.792,57.15) ; v1(63.1,60.5) C13.2@63.4,60.2 ; 65,53.4 64.9,53.5 66.5,53.5 66.5,48.1 ; v1(75.6,56.6) v1(75.6,58.3)
  Bottom Layer w1.016: R33.2@54.922,44.36 55.641,43.641 55.641,43.567 56.055,43.153 64.256,43.153 66.5,45.397 66.5,48.1 66.285,48.1 66.208,48.023 65.058,48.023 R200.1@65,47.965 ; S1.3@55.753,97.13 62.812,97.13 66.624,93.318 R32.2@66.624,82.931
  Bottom Layer w1.524: v1@47.8,71.3 42,71.3 ; v1@47.938,71.3 48.955,71.3 49.055,71.4 v1(49.9,71.4) ; v1(50.9,118) v1(48.8,118) v1(46.9,118) 43.5,118 42,116.5 42,97.13 ; S1.3@55.753,97.13 S1.2@53.213,97.13 S1.1@50.673,97.13 42,97.13 ; 64.9,53.5 49.298,53.5 42,60.798 42,71.3 ; 66.5,53.5 68.05,55.05 74.05,55.05 v1(75.6,56.6) ; 42,71.3 42,80.753 41.918,80.836 41.918,90.459 41.783,90.594 P3.2@41.783,92.964 41.783,96.913 42,97.13
  other v1: 47.9,70
"B_CLOCK TEST_G": P5.16 U3.10 | length 21.3
  Bottom Layer w0.305: v1(83.4,72.852) 89.019,78.471 89.019,81.972 93.305,86.258 94.957,86.258 96.329,87.63 P5.16@96.52,87.63
B_G_LED_CH1: P5.1 U5.2 | length 16.4
  Bottom Layer w0.305: v1(78.6,107.892) 91.307,107.892 93.789,105.41 P5.1@93.98,105.41
B_G_LED_CH2: P5.3 U5.4 | length 16.6
  Bottom Layer w0.305: v1(78.4,105.4) 87.778,105.4 90.308,102.87 P5.3@93.98,102.87
B_G_LED_CH3: P5.5 U5.6 | length 16.6
  Bottom Layer w0.305: v1(78.4,102.8) 84.679,102.8 87.149,100.33 P5.5@93.98,100.33
B_G_LED_CH4: P5.6 U5.8 | length 14.2
  Bottom Layer w0.305: v1(83.8,101.5) 86.138,99.162 95.161,99.162 96.329,100.33 P5.6@96.52,100.33
B_G_LED_CH5: P5.4 U5.10 | length 14.2
  Bottom Layer w0.305: v1(83.759,104.072) 88.406,104.072 90.776,101.702 95.161,101.702 96.329,102.87 P5.4@96.52,102.87
B_G_LED_CH6: P5.2 U5.12 | length 14.2
  Bottom Layer w0.305: v1(83.8,106.7) 88.382,106.7 90.84,104.242 95.161,104.242 96.329,105.41 P5.2@96.52,105.41
B_G_LED_CH7: P5.7 U4.2 | length 17.9
  Bottom Layer w0.305: v1(78.6,91.652) 87.651,91.652 93.789,97.79 P5.7@93.98,97.79
B_G_LED_CH8: P5.9 U4.4 | length 17.9
  Bottom Layer w0.305: v1(78.6,89.112) 86.512,89.112 91.773,94.373 92.852,94.373 93.729,95.25 P5.9@93.98,95.25
B_G_LED_CH9: P5.11 U4.6 | length 17.9
  Bottom Layer w0.305: v1(78.6,86.572) 87.651,86.572 93.789,92.71 P5.11@93.98,92.71
B_G_LED_CH10: P5.12 U4.8 | length 16.2
  Bottom Layer w0.305: v1(83.4,85.302) 87.081,85.302 93.117,91.338 94.957,91.338 96.329,92.71 P5.12@96.52,92.71
B_G_LED_CH11: P5.10 U4.10 | length 16.2
  Bottom Layer w0.305: v1(83.4,87.842) 86.291,87.842 92.327,93.878 94.957,93.878 96.329,95.25 P5.10@96.52,95.25
B_G_LED_CH12: P5.8 U4.12 | length 16.2
  Bottom Layer w0.305: v1(83.4,90.382) 87.081,90.382 93.117,96.418 94.957,96.418 96.329,97.79 P5.8@96.52,97.79
B_G_LED_CH13: P5.13 U3.2 | length 21
  Bottom Layer w0.305: v1(78.6,76.662) 80.281,76.662 93.789,90.17 P5.13@93.98,90.17
B_G_LED_CH14: P5.15 U3.4 | length 22.9
  Bottom Layer w0.305: v1(78.6,74.122) 83.513,74.122 88.524,79.133 88.524,82.365 93.789,87.63 P5.15@93.98,87.63
B_G_LED_CH15: P5.17 U3.6 | length 22.9
  Bottom Layer w0.305: v1(78.6,71.582) 83.513,71.582 89.514,77.583 89.514,80.815 93.789,85.09 P5.17@93.98,85.09
B_G_LED_CH16: P5.18 U3.8 | length 21.3
  Bottom Layer w0.305: v1(83.4,70.313) 90.01,76.923 90.01,80.422 93.305,83.718 94.957,83.718 96.329,85.09 P5.18@96.52,85.09
"B_VOLTAGE TEST _G": P5.14 U3.12 | length 21.3
  Bottom Layer w0.305: v1(83.4,75.392) 83.4,78.893 93.305,88.798 94.957,88.798 96.329,90.17 P5.14@96.52,90.17
BUZZER: R38.1 U1.35 | length 18.9
  Top Layer w0.305: R38.1@46.863,42.265 46.863,43.173 49.706,46.016 53.893,46.016 56.6,48.723 56.6,50.758 55.906,51.451 U1.35@55.906,54.367
CH1: P2.1 Q1.1 Q1.2 Q1.3 R3.1 | length 17.9
  Top Layer w0.254: Q1.2@17.45,127.914 Q1.2@18.161,127.914
  Top Layer w0.5: Q1.2@18.161,127.914 19.964,126.111 R3.1@19.964,123.52
  Top Layer w3: P2.1@5.385,127.914 Q1.2@17.45,127.914
CH2: P2.2 Q5.1 Q5.2 Q5.3 R9.1 | length 18.5
  Top Layer w0.5: Q5.2@17.45,120.294 19.206,120.294 19.964,119.536 R9.1@19.964,115.895
  Top Layer w3: P2.2@5.385,120.294 Q5.2@17.45,120.294
CH3: P2.3 Q10.1 Q10.2 Q10.3 R13.1 | length 17.9
  Top Layer w0.254: Q10.2@17.45,112.674 Q10.2@18.161,112.674
  Top Layer w0.5: Q10.2@18.161,112.674 19.964,110.871 R13.1@19.964,108.27
  Top Layer w3: P2.3@5.385,112.674 Q10.2@17.45,112.674
CH4: P2.4 Q14.1 Q14.2 Q14.3 R20.1 | length 17.9
  Top Layer w0.254: Q14.2@17.45,105.054 Q14.2@18.161,105.054
  Top Layer w0.5: Q14.2@18.161,105.054 19.964,103.251 R20.1@19.964,100.645
  Top Layer w3: P2.4@5.385,105.054 Q14.2@17.45,105.054
CH5: P2.5 Q18.1 Q18.2 Q18.3 R27.1 | length 17.9
  Top Layer w0.254: Q18.2@17.45,97.434 Q18.2@18.161,97.434
  Top Layer w0.5: Q18.2@18.161,97.434 19.964,95.631 R27.1@19.964,93.02
  Top Layer w3: P2.5@5.385,97.434 Q18.2@17.45,97.434
CH6: P2.6 Q22.1 Q22.2 Q22.3 R36.1 | length 17.9
  Top Layer w0.254: Q22.2@17.45,89.814 Q22.2@18.161,89.814
  Top Layer w0.5: Q22.2@18.161,89.814 19.964,88.011 R36.1@19.964,85.395
  Top Layer w3: P2.6@5.385,89.814 Q22.2@17.45,89.814
CH7: P2.7 Q26.1 Q26.2 Q26.3 R43.1 | length 18
  Top Layer w0.254: Q26.2@17.424,82.194 Q26.2@18.186,82.194
  Top Layer w0.5: Q26.2@18.186,82.194 19.964,80.417 R43.1@19.964,77.77
  Top Layer w3: P2.7@5.385,82.194 Q26.2@17.424,82.194
CH8: P2.8 Q30.1 Q30.2 Q30.3 R46.1 | length 18
  Top Layer w0.254: Q30.2@17.424,74.574 Q30.2@18.186,74.574
  Top Layer w0.5: Q30.2@18.186,74.574 19.964,72.797 R46.1@19.964,70.145
  Top Layer w3: P2.8@5.385,74.574 Q30.2@17.424,74.574
CH9: P2.9 Q32.1 Q32.2 Q32.3 R48.1 | length 18
  Top Layer w0.254: Q32.2@17.45,66.954 Q32.2@18.161,66.954
  Top Layer w0.5: Q32.2@18.161,66.954 19.964,65.151 R48.1@19.964,62.52
  Top Layer w3: P2.9@5.385,66.954 Q32.2@17.45,66.954
CH10: P2.10 Q2.1 Q2.2 Q2.3 R4.1 | length 18
  Top Layer w0.254: Q2.2@17.45,59.334 Q2.2@18.161,59.334
  Top Layer w0.5: Q2.2@18.161,59.334 19.964,57.531 R4.1@19.964,54.894
  Top Layer w3: P2.10@5.385,59.334 Q2.2@17.45,59.334
CH11: P2.11 Q6.1 Q6.2 Q6.3 R10.1 | length 18
  Top Layer w0.5: Q6.2@17.45,51.714 18.161,51.714 19.964,49.911 R10.1@19.964,47.269
  Top Layer w3: P2.11@5.385,51.714 Q6.2@17.45,51.714
CH12: P2.12 Q11.1 Q11.2 Q11.3 R14.1 | length 18
  Top Layer w0.254: Q11.2@17.45,44.094 Q11.2@18.161,44.094
  Top Layer w0.5: Q11.2@18.161,44.094 19.964,42.291 R14.1@19.964,39.644
  Top Layer w3: P2.12@5.385,44.094 Q11.2@17.45,44.094
CH13: P2.13 Q15.1 Q15.2 Q15.3 R21.1 | length 18
  Top Layer w0.254: Q15.2@17.45,36.474 Q15.2@18.161,36.474
  Top Layer w0.5: Q15.2@18.161,36.474 19.964,34.671 R21.1@19.964,32.019
  Top Layer w3: P2.13@5.385,36.474 Q15.2@17.45,36.474
CH14: P2.14 Q19.1 Q19.2 Q19.3 R28.1 | length 18.3
  Top Layer w0.5: Q19.2@17.45,28.854 17.471,28.833 18.767,28.833 19.964,27.636 R28.1@19.964,24.394
  Top Layer w3: P2.14@5.385,28.854 Q19.2@17.45,28.854
CH15: P2.15 Q23.1 Q23.2 Q23.3 R37.1 | length 18.3
  Top Layer w0.5: Q23.2@17.45,21.234 17.471,21.213 18.794,21.213 19.964,20.043 R37.1@19.964,16.769
  Top Layer w3: P2.15@5.385,21.234 Q23.2@17.45,21.234
CH16: P2.16 Q27.1 Q27.2 Q27.3 R44.1 | length 18
  Top Layer w0.254: Q27.2@17.45,13.614 Q27.2@18.161,13.614
  Top Layer w0.5: Q27.2@18.161,13.614 19.964,11.811 R44.1@19.964,9.144
  Top Layer w3.175: P2.16@5.385,13.614 Q27.2@17.45,13.614
"CLOCK COMMAND OUT": D1.K P1.1 Q7.3 | length 42.9
  Top Layer w0.254: 36.1,0.648 36.5,0.648
  Top Layer w0.5: D1.K@34.652,7.188 34.852,6.988 35.671,6.988 36.489,6.17 36.489,3.415 36.5,3.403 36.5,0.648 38.74,0.648 40.872,2.78 40.872,4.267 40.579,4.56 Q7.3@39.329,4.56
  Top Layer w1.016: P1.1@11.252,3.556 11.252,3.206 13.811,0.648 36.1,0.648
"CLOCK IN": P1.3 R19.1 | length 4.9
  Top Layer w1.016: P1.3@16.332,3.556 16.482,3.706 16.482,4.99 17.309,5.817 R19.1@19.533,5.817
"CLOCK SAMPLE": D3.2 R22.2 U1.5 | length 90.1
  Top Layer w0.305: R22.2@27.381,7.595 27.381,7.845 27.679,8.142 31.361,8.142 31.773,8.555 32.055,8.555 32.055,5.023 D3.2@32.131,4.946 ; v1(40,72.1) 40.161,71.939 41.245,71.939 41.7,71.484 41.7,69.892 44.727,66.865 U1.5@49.804,66.865
  Bottom Layer w0.305: v1(32.055,8.574) 33.489,8.574 39.4,14.485 39.4,42.3 40.8,43.7 40.8,71.4 40.1,72.1 v1(40,72.1)
"CLOCK TEST_G": U1.54 U3.11 | length 30.6
  Top Layer w0.305: U1.54@65.004,58.365 69.48,58.365 79.935,68.821 84.318,68.821 85.338,69.841 85.338,72.984 84.2,74.122 U3.11@83.4,74.122
"CURRENT SAMPEL": J3.3 U1.3 | length 78.3
  Top Layer w0.254: v1(39.348,76.833) 39.348,75.012 40.488,73.871 41.757,73.871 42.988,72.641 42.988,69.897 45.02,67.865 U1.3@49.804,67.865
  Top Layer w1.016: v1(38.798,123.5) 42.74,123.5 J3.3@49.54,130.3
  Bottom Layer w1.016: v1(38.798,123.5) 38.798,81.646 40.539,79.905 40.539,78.048 39.348,76.856 v1(39.348,76.833)
DLED1: R500.2 U1.38 | length 18.6
  Top Layer w0.305: R500.2@48.672,40.64 48.922,40.64 49.408,41.125 49.408,41.232 53.697,45.521 54.098,45.521 57.404,48.826 U1.38@57.404,55.265
DLED2: R101.2 U1.39 | length 17.9
  Top Layer w0.305: R101.2@50.45,40.64 50.45,41.547 53.929,45.025 54.303,45.025 57.904,48.626 U1.39@57.904,55.265
ERASE: S1.5 U1.92 | length 64.1
  Top Layer w0.254: S1.5@53.213,104.75 53.213,104.513 52.976,104.513 51.408,102.945 49.339,102.945 48.016,102.945 40.069,94.997 38.656,93.584 38.656,88.816 38.656,87.616 41.08,85.192 42.28,85.192 56.906,85.192 v1(60.5,81.597) ; U1.92@55.404,70.465 55.413,70.474 55.413,71.535 55.95,72.072 57.891,72.072 59.067,73.249 59.067,74.414 v1(58.982,74.5)
  Bottom Layer w0.254: v1(58.982,74.5) 59.067,74.586 59.067,80.165 v1(60.5,81.597)
G_LED_CH1: U1.75 U5.1 | length 46.5
  Top Layer w0.305: U1.75@65.902,68.867 67.28,70.246 67.373,70.246 68.751,71.624 68.751,100.87 77.043,109.162 U5.1@78.6,109.162
G_LED_CH2: U1.74 U5.3 | length 45.5
  Top Layer w0.305: U1.74@65.004,68.365 65.006,68.367 66.195,68.367 69.246,71.419 69.246,98.825 77.043,106.622 U5.3@78.6,106.622
G_LED_CH3: U1.73 U5.5 | length 43.8
  Top Layer w0.305: U1.73@65.004,67.865 66.393,67.865 69.741,71.214 69.741,97.124 76.699,104.082 U5.5@78.6,104.082
G_LED_CH4: U1.72 U5.9 | length 44.9
  Top Layer w0.305: U1.72@65.004,67.365 66.593,67.365 70.237,71.009 70.237,91.206 81.843,102.812 U5.9@83.4,102.812
G_LED_CH5: U1.71 U5.11 | length 49.4
  Top Layer w0.305: U1.71@65.004,66.865 66.794,66.865 70.732,70.804 70.732,88.012 77.596,94.876 78.559,94.876 84.843,101.16 84.843,104.709 84.2,105.352 U5.11@83.4,105.352
G_LED_CH6: U1.70 U5.13 | length 53
  Top Layer w0.305: U1.70@65.004,66.365 66.994,66.365 71.227,70.598 71.227,87.807 77.801,94.381 78.764,94.381 85.338,100.955 85.338,106.754 84.2,107.892 U5.13@83.4,107.892
G_LED_CH7: U1.69 U4.1 | length 34.9
  Top Layer w0.305: U1.69@65.004,65.865 67.195,65.865 71.723,70.393 71.723,87.602 77.043,92.922 U4.1@78.6,92.922
G_LED_CH8: U1.67 U4.3 | length 34.4
  Top Layer w0.305: U1.67@65.004,64.865 69.031,64.865 72.218,68.052 72.218,85.557 77.043,90.382 U4.3@78.6,90.382
G_LED_CH9: U1.66 U4.5 | length 32.7
  Top Layer w0.305: U1.66@65.004,64.365 69.231,64.365 72.713,67.847 72.713,83.896 76.659,87.842 U4.5@78.6,87.842
G_LED_CH10: U1.65 U4.9 | length 33.8
  Top Layer w0.305: U1.65@65.004,63.865 69.432,63.865 73.209,67.642 73.209,77.938 81.843,86.572 U4.9@83.4,86.572
G_LED_CH11: U1.64 U4.11 | length 39.7
  Top Layer w0.305: U1.64@65.004,63.365 69.632,63.365 73.704,67.437 73.704,75.994 78.597,80.887 80.694,80.887 85.136,85.329 85.136,88.933 84.957,89.112 U4.11@83.4,89.112
G_LED_CH12: U1.63 U4.13 | length 42.8
  Top Layer w0.305: U1.63@65.004,62.865 69.833,62.865 74.199,67.231 74.199,75.789 78.802,80.392 80.9,80.392 85.631,85.123 85.631,90.221 84.2,91.652 U4.13@83.4,91.652
G_LED_CH13: U1.60 U3.1 | length 25.5
  Top Layer w0.305: U1.60@65.004,61.365 67.5,61.365 68.504,62.37 70.038,62.37 74.694,67.026 74.694,75.584 77.043,77.932 U3.1@78.6,77.932
G_LED_CH14: U1.59 U3.3 | length 23.5
  Top Layer w0.305: U1.59@65.004,60.865 67.7,60.865 68.709,61.874 70.243,61.874 75.19,66.821 75.19,73.539 77.043,75.392 U3.3@78.6,75.392
G_LED_CH15: U1.56 U3.5 | length 22.4
  Top Layer w0.305: U1.56@65.004,59.365 68.966,59.365 75.685,66.084 75.685,71.494 77.043,72.852 U3.5@78.6,72.852
G_LED_CH16: U1.55 U3.9 | length 27.1
  Top Layer w0.305: U1.55@65.004,58.865 69.279,58.865 79.73,69.316 84.113,69.316 84.843,70.046 84.843,70.939 84.2,71.582 U3.9@83.4,71.582